# Altium PCB CamLink.PcbDoc (part 2 of 2)
Units mm, origin at the board's own origin, x right, y up, seen from the top; angles counter-clockwise.
Board outline 65 x 55 mm, 4 copper layers (TOP SIG, PWR, GND, BOT SIG), stack 1.586 mm thick; 141 components, 88 nets, 397 pads, 242 vias.
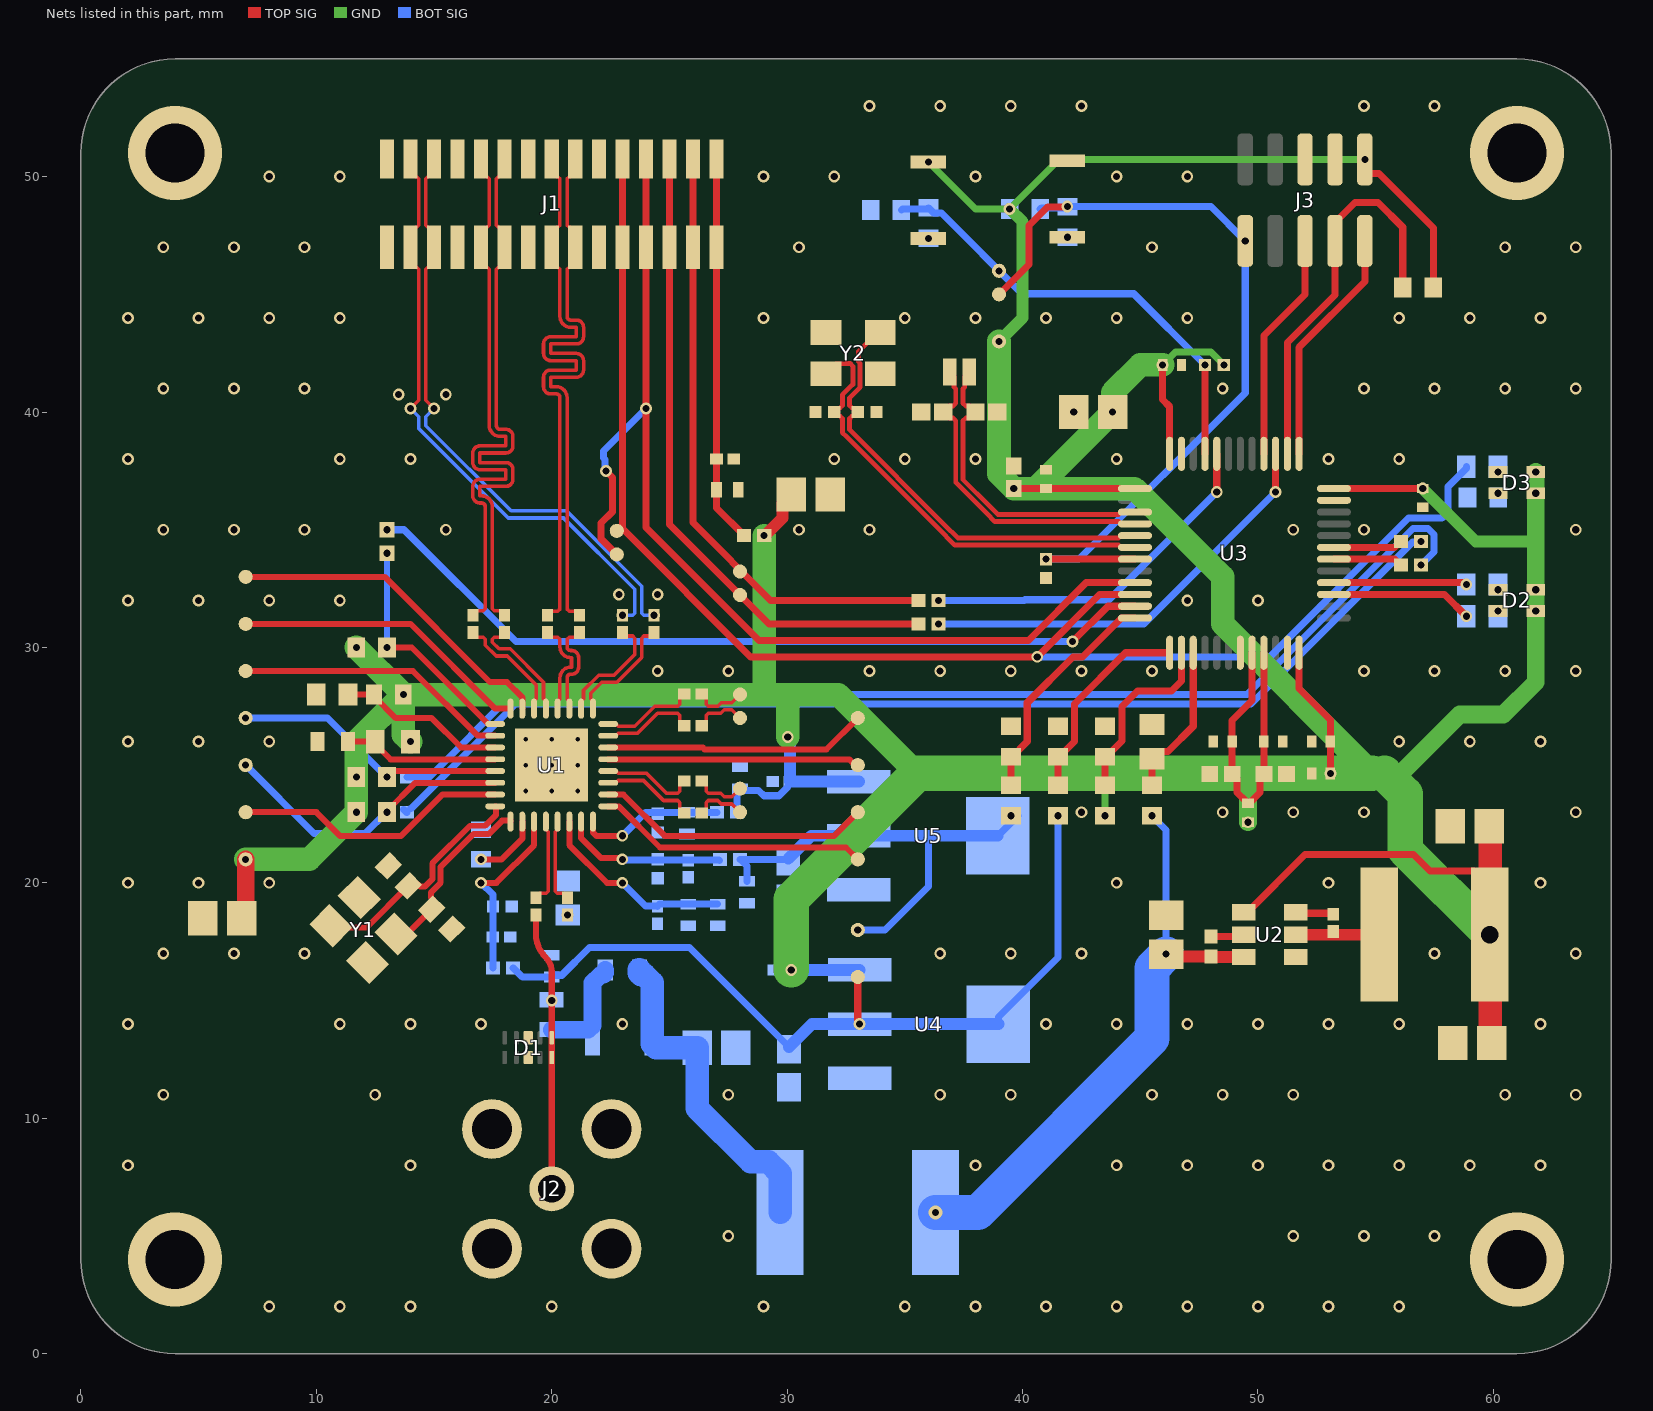
[diagram p4: the nets of this part, all layers, seen from the top]

## Part data (continued)
R19: library part CMP-2000-04011-1, Manufacturer=Yageo, Part Number=RC0603FR-0732K4L
R20: library part CMP-2000-00538-1, Manufacturer=Panasonic, Part Number=ERJ-3EKF49R9V
R21: library part CMP-2000-04112-1, Manufacturer=Yageo, Part Number=RC0603FR-0768K1L
R22: library part CMP-2000-00484-1, Manufacturer=Panasonic, Part Number=ERJ-3EKF4020V
R23 R25 R26 R32 R33 R40 R41 R42 R45 R50 R51 R52 R53: library part CMP-1012-00623-3, "Chip Resistor, 10 KOhm, +/- 1%, 0.1 W, -55 to 155 degC, 0603 (1608 Metric), RoHS, Tape and Reel", Case Code (Imperial)=0603, Case Code (Metric)=1608, Manufacturer=Panasonic, Max Operating Temperature=155degC, Max Power Dissipation=100mW, Min Operating Temperature=-55degC, Package Description="2-Pin Surface Mount Device, Body 1.6 x 0.85 mm", Package Quantity=1, Package Reference=603, Resistance=10KOhm, Temperature Coefficient=100ppm\/degreesC, Tolerance=1%, Voltage Rating=75V, Case\/Package=0603, Composition=ThickFilm, Contact Plating=Tin, Datasheet URL=https://industrial.panasonic.com/cdbs/www-data/pdf/RDA0000/AOA0000C304.pdf, Datasheet Version=02/2017, Depth=0.8mm, Height=0.45mm, Lead Free=LeadFree, Length=1.6mm, Manufacturer URL=http://www.panasonic.com/, Military Standard=Not, Mount=SurfaceMount, Mounting Technology=SurfaceMount, Number of Pins=2, Number of Terminations=2, Packaging=TapeandReel, Power Rating=100mW, Radiation Hardening=No, REACH SVHC=NoSVHC, RoHSCompliant=true, Termination=SMD/SMT, Voltage Rating (DC)=75V, Width=0.031inch
R24: library part CMP-009-00118-2, "READ THE NAME", Component Type=Standard, Design Item ID=CMP-009-00206-2, Pins=2, Source=0402jump.SchLib
R30: library part CMP-2000-00540-8, "RES SMD 5.1K OHM 1% 1/10W 0603", Case Code (Imperial)=0603, Case Code (Metric)=1608, Max Operating Temperature=155°C, Max Power Dissipation=100mW, Min Operating Temperature=-55°C, Package Quantity=1, Resistance=5.1kR, Resistance Tolerance=1%, Resistor Type="Thick Film", Temperature Coefficient=100ppm/°C, Voltage Rating=75V, Case/Package=0603, Construction=Rectangular, Contact Plating=Tin, Depth=0.8mm, Features="Automotive AEC-Q200", Height=0.022inch, Lead Free="Lead Free", Length=1.6mm, Military Standard=Not, Mount="Surface Mount", Number of Terminations=2, Packaging="Tape and Reel", Power Rating=100mW, Radiation Hardening=No, Reach SVHC Compliant=Yes, RoHS Compliant=Yes, Series=ERJ, Size Code=0603, Termination=SMD/SMT, Tolerance=1%, Voltage Rating (DC)=75V, Weight=7.1E-05oz, Width=0.8mm
R34 R36 R38: library part CMP-2000-00435-2, "Chip Resistor, 330 Ohm, +/- 1%, 0.1 W, -55 to 155 degC, 0603 (1608 Metric), RoHS, Tape and Reel", Current Rating="500 mA", Max Operating Temperature="85 degC", Min Operating Temperature="-25 degC", Package Quantity=1500, Voltage Rating="10 V", ComponentLink1Description="Manufacturer URL", ComponentLink1URL=http://www.panasonic.com/, ComponentLink2Description=Datasheet, ComponentLink2URL=http://industrial.panasonic.com/cdbs/www-data/pdf/RDA0000/AOA0000C86.pdf, Contact Finish=Gold, Contact Material=Copper, Contact Plating=Gold, DatasheetVersion=Apr-15, Gender=Male, Height="1.45 mm", Lead Pitch="1.1 mm", Length="13.7 mm", Mating Cycles=10000, Mount="Surface Mount", PackageDescription="2-Pin Surface Mount Device, Body 1.6 x 0.85 mm", PackageReference=0603, Packaging="Tape and Reel", Pins=8, REACH SVHC="No SVHC", RoHSCompliant=true, Width="1.45 mm"
R35 R37 R39: library part CMP-2000-00572-1, Manufacturer=Panasonic, Part Number=ERJ3EKF56R0V
R54: library part CMP-2000-00317-1, Manufacturer=Panasonic, Part Number=ERJ-3EKF2001V
SW1 SW2: library part CMP-10040-000029-1, "SWITCH TACTILE SPST-NO 0.02A 15V", Current Rating=5A, Flammability Rating="UL94 V-0", Insulation Color=Black, Max Operating Temperature=85°C, Min Operating Temperature=-40°C, Operating Force=240gf, Actuator Type=Standard, Connector Type=USB, Contact Plating=Gold, Gender=Receptacle, Illumination Type=Non-Illuminated, Mechanical Life=500000Cycles, Mount="Surface Mount", Number of Contacts=24, Number of Ports=1, Packaging="Tape and Reel", Switch Function=Off-Mom, Switch Travel=0.13mm, Termination=Solder, Throw Configuration=SPST
TP1 TP2 TP3 TP4 TP5 TP6 TP7 TP8 TP9 TP10 TP11 TP12 TP13 TP14 TP15 TP16 TP17 TP18 TP19 TP20 TP21 TP22 TP23 TP24 TP25: library part CMP-00025-2, "Test Point .6mm"
U1: library part CMP-015-00012-1, "3Gbps Serializer TQFN-32 Serializers / Deserializers ROHS"
U2: library part CMP-12757-000006-1, "IC REG BUCK 3.3V 2A TSOT26", Ambient Temperature Range High=+85°C, Ambient Temperature Range Low=-40°C, Manufacturer="Diodes Inc.", Max Junction Temp=+160°C, Max Supply Voltage=32V, Min Supply Voltage=3.8V, Nominal Supply Current=22uA, Output Current=2A, Output Voltage=3.3V, Package=TSOT26, Switching Frequency=1.1MHz, Temperature="to +160°C", Automotive=No, Category=IC, ComponentLink2Description=Datasheet, ComponentLink2URL=https://www.diodes.com/assets/Datasheets/AP63200-AP63201-AP63203-AP63205.pdf, Device Class L1="Integrated Circuits (ICs)", Device Class L2="Power Management ICs", Device Class L3="Voltage Regulators - Switching", Digikey Description="IC REG BUCK 3.3V 2A TSOT26", Footprint Url=https://www.diodes.com/assets/Package-Files/TSOT26.pdf, Height=1mm, Lead Free=Yes, Manufacturer Part Number=AP63203WU-7, Mouser Description="AP63203 Series 3.3 V 2 A SMT Fixed Low IQ Synchronous Buck - TSOT-26", Number Of Outputs=1, Octopart=https://octopart.com/ap63203wu-7-diodes+inc.-98099550, Output Type=Fixed, RoHS=TRUE, Standoff Height=0.01mm, Switching Topology=Buck, Temperature Range High=+160°C
U3: library part CMP-020-00017-1, "IC MCU 32BIT 32KB FLASH 48LQFP", RoHS Compliant=Yes
U4: library part CMP-0244-00308-1, "Fixed Low Drop Positive Voltage Regulator, 1.8V, 4-Pin SOT-223, Tape and Reel", ComponentLink1Description="Manufacturer URL", ComponentLink1URL=http://www.st.com, ComponentLink2Description=Datasheet, ComponentLink2URL=http://www.st.com/internet/com/TECHNICAL_RESOURCES/TECHNICAL_LITERATURE/DATASHEET/CD00000544.pdf, DatasheetVersion=1/11/2011, PackageDescription="4-Pin SOT-223 Package, 6.5 x 3.5 mm Body, 2.3 mm Pitch, 7 mm Lead Span", PackageReference=SOT-223, PackageVersion=2010
U5: library part CMP-0244-00318-1, "Fixed Low Drop Positive Voltage Regulator, 1.2V, 4-Pin SOT-223, Tape and Reel", ComponentLink1Description="Manufacturer URL", ComponentLink1URL=http://www.st.com, ComponentLink2Description=Datasheet, ComponentLink2URL=http://www.st.com/internet/com/TECHNICAL_RESOURCES/TECHNICAL_LITERATURE/DATASHEET/CD00000544.pdf, DatasheetVersion=1/11/2011, PackageDescription="4-Pin SOT-223 Package, 6.5 x 3.5 mm Body, 2.3 mm Pitch, 7 mm Lead Span", PackageReference=SOT-223, PackageVersion=2010
Y1: library part CMP-2000-05733-3, "Crystal 25MHz ±20ppm (Tol) ±30ppm (Stability) 18pF FUND 60Ω 4-Pin SMD T/R", Case/Package=CSMD, ESR (Equivalent Series Resistance)=60R, Frequency=25MHz, Frequency Stability=30ppm, Frequency Tolerance=20ppm, Load Capacitance=18pF, Max Operating Temperature=85°C, Min Operating Temperature=-40°C, Operating Frequency="25 MHz", Package Quantity=1000, Depth=2.5mm, Height=0.039inch, Lead Free="Lead Free", Length=3.2mm, Mount="Surface Mount", Number of Pins=4, Packaging="Tape and Reel", Radiation Hardening=No, Series=ABM8G, Series Resistance=60R, Termination=SMD/SMT, Tolerance=20ppm, Width=0.098inch
Y2: library part CMP-27762-011708-1, "Crystal 48MHz ±20ppm 18pF SMD-4 3.2mm x 2.5mm", Case/Package=CSMD, ESR (Equivalent Series Resistance)=35R, Frequency=48MHz, Frequency Stability=50ppm, Frequency Tolerance=20ppm, Load Capacitance=18pF, Max Operating Temperature=70°C, Min Operating Temperature=-20°C, Operating Frequency="48 MHz", Package Quantity=1000, Resistor Type=Ceramic, Depth=2.5mm, Height=0.031inch, Lead Free="Lead Free", Length=3.2mm, Mount="Surface Mount", Number of Pins=4, Packaging="Tape and Reel", Radiation Hardening=No, REACH SVHC="No SVHC", RoHS Compliant=Yes, Series=ABM8, Series Resistance=35R, Termination=SMD/SMT, Tolerance=20ppm, Width=0.098inch
Y3: library part CMP-40224-000006-1, "CRYSTAL 32.7680KHZ 12.5PF SMD", Frequency=32.768kHz, Load Capacitance=12.5pF, Manufacturer="ECS International", Package=ECX-1210, Temperature="-40°C to +85°C", Temperature Range High=+85°C, Temperature Range Low=-40°C, Tolerance=20ppm, Automotive=No, Category=Crys, ComponentLink2Description=Datasheet, ComponentLink2URL=https://ecsxtal.com/store/pdf/ECX-1210.pdf, Device Class L1="Passive Components", Device Class L2="Crystals / Oscillators", Device Class L3=Crystals, Digikey Description="CRYSTAL 32.7680KHZ 12.5PF SMD", ESR=90kΩ, Height=0.5mm, Lead Free=Yes, Manufacturer Part Number=ECS-.327-12.5-1210-TR, Octopart=https://octopart.com/ecs-.327-12.5-1210-tr-ecs+international-81221340, RoHS=TRUE, Series=ECX-1210

## Via types
v1: diameter 0.5, hole 0.3, TOP SIG to BOT SIG, tented both sides, 151 vias
v2: diameter 0.5, hole 0.3, TOP SIG to BOT SIG, tented top, 69 vias
v3: diameter 0.5, hole 0.2, TOP SIG to BOT SIG, 9 vias
v4: diameter 0.5, hole 0.3, TOP SIG to BOT SIG, 8 vias
v5: diameter 4, hole 2.5, TOP SIG to BOT SIG, 4 vias
v6: diameter 1, hole 0.75, TOP SIG to BOT SIG, tented top, 1 vias

## Nets (pads, with @x,y where several pads share a name; then routed paths per layer and width w, separated by ;. In a path a pad name is that pad's centre, name@x,y a point inside that pad or via, vN(x,y) a via of type N, cw(c..) or ccw(c..) an arc to the next point about the centre after c; other vN are vias at no path point)
1V2: C28.1 C54.1 R29.1 R50.2 TP18.1 U5.2 U5.4 | length 19.8
  BOT SIG w0.3: R29.1@28,21 R29.1@28.025,21 ; C28.1@28.3,20.062 28.3,20.725 R29.1@28.025,21 ; C54.1@29.977,21 R29.1@28.025,21 ; v2(33,18) 34.15,18 36,19.85 36,22 ; U5.4@38.95,22 39.8,22.85 v2(39.5,22.85)
  BOT SIG w0.5: C54.1@30.05,21.025 31.025,22 U5.2@33.05,22 36,22 U5.4@38.95,22
1V2_SENSE: R50.1 R52.2 U3.12 | length 9.9
  TOP SIG w0.3: R50.1@39.5,24.15 R52.2@39.5,25.35 39.55,25.35 40.2,26 40.2,27.65 42.15,29.6 42.55,29.6 44.2,31.25 U3.12@44.775,31.25
1V8: C27.1 C53.1 R28.1 R45.2 TP17.1 U4.2 U4.4 | length 35.7
  TOP SIG w0.3: TP17.1@33,16 33,14.129 33.075,14.054 v2(33.075,14)
  BOT SIG w0.3: R28.1@18.35,16.375 18.375,16.375 18.75,16 C27.1@20,16 20.075,16.075 20.425,16.075 21.6,17.25 25.85,17.25 30.075,13.025 C53.1@30.075,12.927 ; U4.4@38.975,14 38.975,14.3 41.5,16.825 v2@41.5,23.042
  BOT SIG w0.5: C53.1@30.075,13.025 31.05,14 v2(33.075,14) U4.4@38.975,14
  other v2: 41.5,22.85
1V8_SENSE: R45.1 R51.2 U3.13 | length 8.7
  TOP SIG w0.3: R45.1@41.5,24.15 R51.2@41.5,25.35 41.55,25.35 42.2,26 42.2,27.6 44.375,29.775 U3.13@46.25,29.775
3V3: C26.1 C32.2 C33.2 C34.2 C35.2 C36.2 C37.2 C39.1 C40.2 C41.2 C42.2 C45.1 C46.2 C55.2 C56.2 D2.2 D2.3 D3.2 D3.3 FB1.1 J3.1 L3.2 R16.2 R17.2 R19.2 R23.2 R25.2 R26.2 R27.1 R32.2 R40.1 R42.1 SW1.2 TP15.1 TP19.1 U2.1 U3.1 U3.24 U3.36 U3.48 U4.3 U5.3 | length 244.2
  TOP SIG w0.3: v2(39.625,36.75) C46.2@41,36.75 U3.1@44.775,36.75 ; v2(45.95,42) 45.95,40.525 46.25,40.225 U3.48@46.25,38.225 ; U2.1@49.401,18.75 49.551,18.75 52.001,21.2 56.6,21.2 57.3,20.5 59.2,20.5 59.85,19.85 v6(59.85,17.8) ; U3.24@51.75,29.775 51.75,28.25 53.079,26.921 C40.2@53.079,26 v2(53.079,24.65) ; U3.36@53.225,36.75 v2(57,36.75) ; v2(54.54,50.73) 54.54,50.305 54.714,50.131 55.139,50.131 57.45,47.82 R40.1@57.45,45.3 ; C32.2@59.926,13.2 C32.2@60.126,13
  TOP SIG w0.5: v2(29.025,34.75) 29.05,34.75 29.797,35.497 29.797,36.123 C34.2@30.174,36.5
  TOP SIG w0.75: C36.2@6.826,18.5 7,18.674 v2(7,21)
  TOP SIG w1: C33.2@59.826,22.4 59.876,22.35 59.876,13.25 C32.2@59.926,13.2
  GND w0.3: v2(36,50.625) 38,48.625 v2(39.45,48.625) 41.555,50.73 v2(54.54,50.73) ; v2(43.5,22.85) 43.5,24.65 ; v2(45.95,42) 46.5,42.55 48,42.55 v2(48.55,42)
  GND w0.5: v4(39,43) 40,44 40,48.075 v2(39.45,48.625) ; v2(57,36.75) 59.25,34.5 61.8,34.5
  GND w0.75: 49.465,24.65 49.579,24.536 v2(49.579,22.575) ; 55.371,24.65 56.075,24.65 58.575,27.15 60.425,27.15 61.8,28.525 v2(61.8,31.55) v2(61.8,32.45) 61.8,34.5 v2(61.8,36.55) v2(61.8,37.45)
  GND w1: v2(7,21) 9.7,21 v2(11.7,23) v2(11.7,24.5) 11.7,26 v2(13.7,28) ; v2(11.7,30) v2(13.7,28) ; v2(14,26) 13.7,26.3 v2(13.7,28) ; v2(29.025,34.75) 29.025,28 ; v2(30.025,26.2) 30.025,28 ; 35.525,24.65 32.175,28 30.025,28 ; v4(39,43) 39,37.375 v2(39.625,36.75) 40.576,36.75 ; v2(45.95,42) 45,42 43.826,40.826 v2(43.826,40) 40.576,36.75 ; 55.371,24.65 54.85,24.65 48.5,31 48.5,33 44.75,36.75 40.576,36.75 ; v2(13.7,28) 29.025,28 ; 29.025,28 30.025,28
  GND w1.5: v2(30.175,16.3) 30.175,19.3 35.525,24.65 43.5,24.65 49.465,24.65 v2(53.079,24.65) 54.85,24.65 ; 55.371,24.65 56.25,23.771 56.25,21.4 v6(59.85,17.8)
  BOT SIG w0.3: R27.1@27.875,23 27.875,23.925 27.95,24 C26.1@28,24 28.075,23.925 28.788,23.925 29.012,23.7 29.654,23.7 30.005,24.052
  BOT SIG w0.5: v2(30.025,26.2) 30.125,26.1 C56.2@30.125,24.3 U5.3@33.05,24.3 ; v2(30.175,16.3) U4.3@33.075,16.3
3V3_SENSE: R32.1 R33.2 U3.14 | length 7.8
  TOP SIG w0.3: R32.1@43.5,24.15 R33.2@43.5,25.35 43.55,25.35 44.225,26.025 44.225,27.488 44.887,28.15 46.325,28.15 46.75,28.575 U3.14@46.75,29.775
BOOT: C37.1 R34.1 R41.2 TP13.1 U3.45 | length 19.5
  TOP SIG w0.3: U3.45@47.75,38.225 v2(47.75,42)
  BOT SIG w0.3: R41.2@34.85,48.575 34.9,48.625 35.95,48.625 R34.1@36,48.675 36.225,48.45 36.55,48.45 39.975,45.025 44.725,45.025 v2(47.75,42)
  other v4: 39,46
CAM_IO0: J1.11 R39.1 TP24.1 U3.10 | length 63
  TOP SIG w0.3: 23,40.125 23,35.05 28.45,29.6 v4(40.625,29.6) 43.275,32.25 U3.10@44.775,32.25 ; 23,40.15 J1.11@23,47 J1.11@23,50.75
  BOT SIG w0.3: v4(40.625,29.6) 50.5,29.6 56.4,35.5 57.825,35.5 58.075,35.75 58.075,36.825 58.85,37.6 R39.1@58.85,37.675
CAM_IO1: J1.12 TP25.1 U3.9 | length 47
  TOP SIG w0.3: v4@22.3,37.499 22.575,37.224 22.575,35.764 22.1,35.289 22.1,34.615 TP25.1@22.763,33.952 ; J1.12@24,50.75 J1.12@24,47 v4(24,40.15) 24,35.1 28.8,30.3 40.25,30.3 42.7,32.75 U3.9@44.775,32.75
  BOT SIG w0.3: v4(22.3,37.5) 22.262,37.538 22.262,37.988 22.2,38.05 22.2,38.35 v4(24,40.15)
CAM_SCL: J1.13 R49.1 TP16.1 | length 27.8
  TOP SIG w0.3: J1.13@25,50.75 J1.13@25,47 25,35.225 TP16.1@28,32.225 29.225,31 R49.1@35.55,31
CAM_SDA: J1.14 R46.2 TP22.1 | length 26.4
  TOP SIG w0.3: 26,40.125 26,35.3 29.3,32 R46.2@35.575,32 ; 26,40.15 J1.14@26,47 J1.14@26,50.75
CFG0: R17.1 R18.2 U1.3 | length 7.2
  TOP SIG w0.254: R18.2@11.35,28 R17.1@12.45,28 12.45,27.925 13.375,27 14.9,27 16.15,25.75 U1.3@17.6,25.75
CFG1: R19.1 R21.2 U1.4 | length 6.6
  TOP SIG w0.254: R21.2@11.35,26 R19.1@12.5,26 12.5,25.9 13.15,25.25 U1.4@17.6,25.25
CLK_N: C14.2 U1.28 | length 4.2
  TOP SIG w0.152: C14.2@19.825,30.633 19.825,30.6 19.985,30.44 20.26,30.44 20.349,30.351 20.349,30.25 20.349,30.023 ccw(c20.803,30.023) 20.803,29.569 20.84,29.569 20.84,29.163 20.803,29.163 ccw(c20.803,28.71) 20.349,28.71 20.349,28.004 20.349,27.826 20.25,27.727 U1.28@20.25,27.4
CLK_P: C12.2 U1.27 | length 4.2
  TOP SIG w0.152: U1.27@20.75,27.4 20.75,27.727 20.651,27.826 20.651,28.004 20.651,28.71 cw(c20.803,28.71) 20.803,28.861 20.84,28.861 ccw(c20.84,29.163) 21.142,29.163 21.142,29.569 ccw(c20.84,29.569) 20.84,29.871 20.803,29.871 cw(c20.803,30.023) 20.651,30.023 20.651,30.25 20.651,30.351 20.74,30.44 21.015,30.44 21.175,30.6 C12.2@21.175,30.633
CONF_SCL: R26.1 R44.2 TP23.1 U1.6 | length 12.7
  TOP SIG w0.254: v2(13,23) 13,23.05 14.2,24.25 U1.6@17.6,24.25
  BOT SIG w0.3: v4(7,25) 9.9,22.1 12.075,22.1 12.975,23 v2(13,23)
CONF_SDA: R25.1 R43.2 TP21.1 U1.5 | length 11.7
  TOP SIG w0.254: v2(13,24.5) v2(13,24.5) 13.248,24.75 U1.5@17.6,24.75
  BOT SIG w0.3: v4(7,27) 10.475,27 12.975,24.5 v2(13,24.5)
CSI_CLK_N: C14.1 J1.8 | length 25.1
  TOP SIG w0.152: C14.1@19.825,31.367 19.825,31.381 19.985,31.542 20.26,31.542 20.349,31.631 20.349,39.35 20.349,40.619 ccw(c20.197,40.619) 20.197,40.771 19.951,40.771 cw(c19.951,41.073) 19.649,41.073 19.649,41.479 cw(c19.951,41.479) 19.951,41.781 21.049,41.781 21.049,42.186 19.951,42.186 cw(c19.951,42.488) 19.649,42.488 19.649,42.894 cw(c19.951,42.894) 19.951,43.196 21.049,43.196 21.049,43.602 20.803,43.602 cw(c20.803,44.056) 20.349,44.056 20.349,44.283 20.349,46.062 20.26,46.151 20.224,46.151 20,46.375 J1.8@20,47 20,47.625 20.224,47.849 20.26,47.849 20.349,47.938 20.349,49.912 20.26,50.001 20.224,50.001 20,50.225 J1.8@20,50.75
CSI_CLK_P: C12.1 J1.9 | length 25.1
  TOP SIG w0.152: J1.9@21,50.75 21,50.225 20.776,50.001 20.74,50.001 20.651,49.912 20.651,47.938 20.74,47.849 20.776,47.849 21,47.625 J1.9@21,47 21,46.375 20.776,46.151 20.74,46.151 20.651,46.062 20.651,44.283 20.651,44.056 ccw(c20.803,44.056) 20.803,43.904 21.049,43.904 cw(c21.049,43.602) 21.351,43.602 21.351,43.196 cw(c21.049,43.196) 21.049,42.894 19.951,42.894 19.951,42.488 21.049,42.488 cw(c21.049,42.186) 21.351,42.186 21.351,41.781 cw(c21.049,41.781) 21.049,41.479 19.951,41.479 19.951,41.073 20.197,41.073 cw(c20.197,40.619) 20.651,40.619 20.651,39.35 20.651,31.631 20.74,31.542 21.015,31.542 21.175,31.381 C12.1@21.175,31.367
CSI_D0_N: C4.1 J1.2 | length 25.8
  TOP SIG w0.152: v2(14,40.15) 14.349,40.499 14.349,46.062 14.26,46.151 14.224,46.151 14,46.375 J1.2@14,47 14,47.625 14.224,47.849 14.26,47.849 14.349,47.938 14.349,49.912 14.26,50.001 14.224,50.001 14,50.225 J1.2@14,50.75
  BOT SIG w0.152: v2(14,40.15) 14.349,39.801 14.349,39.299 18.148,35.5 20.5,35.5 23.522,32.478 23.522,31.874 23.524,31.872 23.524,31.456 23.435,31.367 v2(23,31.367)
CSI_D0_P: C3.1 J1.3 | length 25.8
  TOP SIG w0.152: v2(15,40.15) 14.651,40.499 14.651,46.062 14.74,46.151 14.776,46.151 15,46.375 J1.3@15,47 15,47.625 14.776,47.849 14.74,47.849 14.651,47.938 14.651,49.912 14.74,50.001 14.776,50.001 15,50.225 J1.3@15,50.75
  BOT SIG w0.152: v2(15,40.15) 14.651,39.801 14.651,39.424 18.273,35.802 20.625,35.802 23.824,32.603 23.824,31.999 23.826,31.997 23.826,31.456 23.915,31.367 v2(24.35,31.367)
CSI_D1_N: C6.1 J1.5 | length 24.9
  TOP SIG w0.152: C6.1@16.65,31.367 16.65,31.4 16.81,31.56 17.085,31.56 17.174,31.649 17.174,34.532 17.174,35.983 ccw(c17.022,35.983) 17.022,36.135 16.951,36.135 cw(c16.951,36.437) 16.649,36.437 16.649,36.843 cw(c16.951,36.843) 16.951,37.145 18.049,37.145 18.049,37.551 16.951,37.551 cw(c16.951,37.853) 16.649,37.853 16.649,38.259 cw(c16.951,38.259) 16.951,38.561 18.049,38.561 18.049,38.967 17.803,38.967 cw(c17.803,39.42) 17.349,39.42 17.349,39.647 17.349,46.062 17.26,46.151 17.224,46.151 17,46.375 J1.5@17,47 17,47.625 17.224,47.849 17.26,47.849 17.349,47.938 17.349,49.912 17.26,50.001 17.224,50.001 17,50.225 J1.5@17,50.75
CSI_D1_P: C5.1 J1.6 | length 24.9
  TOP SIG w0.152: C5.1@18,31.367 18,31.4 17.84,31.56 17.565,31.56 17.476,31.649 17.476,34.532 17.476,35.983 ccw(c17.022,35.983) 17.022,36.437 16.951,36.437 16.951,36.843 18.049,36.843 ccw(c18.049,37.145) 18.351,37.145 18.351,37.551 ccw(c18.049,37.551) 18.049,37.853 16.951,37.853 16.951,38.259 18.049,38.259 ccw(c18.049,38.561) 18.351,38.561 18.351,38.967 ccw(c18.049,38.967) 18.049,39.268 17.803,39.268 cw(c17.803,39.42) 17.651,39.42 17.651,39.647 17.651,46.062 17.74,46.151 17.776,46.151 18,46.375 J1.6@18,47 18,47.625 17.776,47.849 17.74,47.849 17.651,47.938 17.651,49.912 17.74,50.001 17.776,50.001 18,50.225 J1.6@18,50.75
CSI_D2_N: C8.1 TP2.1 | length 2.2
  TOP SIG w0.152: C8.1@26.367,24.325 26.4,24.325 26.56,24.165 26.56,23.89 26.649,23.801 27.179,23.801 27.329,23.651 27.651,23.651 TP2.1@28,24
CSI_D2_P: C7.1 TP1.1 | length 2.2
  TOP SIG w0.152: C7.1@26.367,22.975 26.4,22.975 26.56,23.135 26.56,23.41 26.649,23.499 27.054,23.499 27.204,23.349 27.651,23.349 TP1.1@28,23
CSI_D3_N: C11.1 TP4.1 | length 2.2
  TOP SIG w0.152: C11.1@26.367,28.025 26.4,28.025 26.56,27.865 26.56,27.59 26.649,27.501 27.054,27.501 27.204,27.651 27.651,27.651 TP4.1@28,28
CSI_D3_P: C10.1 TP3.1 | length 2.2
  TOP SIG w0.152: C10.1@26.367,26.675 26.4,26.675 26.56,26.835 26.56,27.11 26.649,27.199 27.179,27.199 27.329,27.349 27.651,27.349 TP3.1@28,27
DA0_N: C4.2 U1.26 | length 4.9
  TOP SIG w0.152: U1.26@21.25,27.4 21.25,27.727 21.349,27.826 21.349,28.178 21.993,28.822 22.645,28.822 23.524,29.701 23.524,30.396 23.435,30.485 23.148,30.485 C4.2@23,30.633
DA0_P: C3.2 U1.25 | length 4.9
  TOP SIG w0.152: U1.25@21.75,27.4 21.75,27.727 21.651,27.826 21.651,28.053 22.118,28.52 22.77,28.52 23.826,29.576 23.826,30.396 23.915,30.485 24.202,30.485 C3.2@24.35,30.633
DA1_N: C6.2 U1.30 | length 4.8
  TOP SIG w0.152: C6.2@16.65,30.633 16.65,30.6 16.81,30.44 17.085,30.44 17.174,30.351 17.174,30.1 17.637,29.637 18.113,29.637 19.349,28.401 19.349,27.826 19.25,27.727 U1.30@19.25,27.4
DA1_P: C5.2 U1.29 | length 4.8
  TOP SIG w0.152: C5.2@18,30.633 18,30.6 17.84,30.44 17.565,30.44 17.476,30.351 17.476,30.225 17.762,29.938 18.239,29.938 19.651,28.526 19.651,27.826 19.75,27.727 U1.29@19.75,27.4
DA2_N: C8.2 U1.20 | length 4
  TOP SIG w0.152: U1.20@22.4,24.75 22.727,24.75 22.826,24.651 24.026,24.651 24.876,23.801 25.351,23.801 25.44,23.89 25.44,24.165 25.6,24.325 C8.2@25.633,24.325
DA2_P: C7.2 U1.19 | length 4
  TOP SIG w0.152: U1.19@22.4,24.25 22.727,24.25 22.826,24.349 23.901,24.349 24.751,23.499 25.351,23.499 25.44,23.41 25.44,23.135 25.6,22.975 C7.2@25.633,22.975
DA3_N: C11.2 U1.24 | length 4
  TOP SIG w0.152: U1.24@22.4,26.75 22.727,26.75 22.826,26.651 23.521,26.651 24.371,27.501 25.351,27.501 25.44,27.59 25.44,27.865 25.6,28.025 C11.2@25.633,28.025
DA3_P: C10.2 U1.23 | length 4
  TOP SIG w0.152: U1.23@22.4,26.25 22.727,26.25 22.826,26.349 23.646,26.349 24.496,27.199 25.351,27.199 25.44,27.11 25.44,26.835 25.6,26.675 C10.2@25.633,26.675
G_LED: R35.1 U3.27 | length 6
  TOP SIG w0.3: U3.27@53.225,32.25 57.925,32.25 v2(58.85,31.325)
GND: C1.2 C2.1 C15.2 C16.2 C17.2 C18.1 C19.1 C20.1 C21.1 C22.1 C23.2 C24.2 C25.1 C26.2 C27.2 C28.2 C29.2 C31.1 C32.1 C33.1 C34.1 C35.1 C36.1 C38.2 C39.2 C40.1 C41.1 C42.1 C43.2 C44.1 C45.2 C46.1 C47.2 C48.1 C49.2 C50.2 C51.2 C52.2 C53.2 C54.2 C55.1 C56.1 D1.3 D1.8 J1.1 J1.4 J1.7 J1.10 J2.2 J3.3 J3.5 R18.1 R20.1 R21.1 R22.1 R33.1 R38.2 R41.1 R51.1 R52.1 R54.1 SW2.2 U1.33 U2.4 U3.19 U3.23 U3.35 U3.47 U4.1 U5.1 Y1.2 Y1.4 Y2.2 Y2.4
  other v1: 8,2 11,2 14,2 20,2 29,2 35,2 38,2 41,2 44,2 47,2 50,2 53,2 56,2 27.5,5 51.5,5 54.5,5 57.5,5 2,8 14,8 38,8 44,8 47,8 50,8 53,8 56,8 59,8 62,8 3.5,11 12.5,11 27.5,11 36.5,11 39.5,11 45.5,11 48.5,11 51.5,11 60.5,11 63.5,11 2,14 11,14 14,14 17,14 23,14 41,14 44,14 47,14 50,14 53,14 56,14 62,14 3.5,17 6.5,17 9.5,17 36.5,17 39.5,17 42.5,17 57.5,17 63.5,17 2,20 5,20 8,20 44,20 53,20 62,20 42.5,23 48.5,23 51.5,23 54.5,23 63.5,23 2,26 5,26 8,26 56,26 59,26 62,26 24.5,29 27.5,29 33.5,29 36.5,29 39.5,29 42.5,29 45.5,29 54.5,29 57.5,29 60.5,29 63.5,29 2,32 5,32 8,32 11,32 47,32 50,32 3.5,35 6.5,35 9.5,35 15.5,35 30.5,35 33.5,35 51.5,35 54.5,35 63.5,35 2,38 11,38 14,38 32,38 35,38 38,38 44,38 53,38 56,38 42.174,40 3.5,41 6.5,41 9.5,41 48.5,41 54.5,41 57.5,41 60.5,41 63.5,41 2,44 5,44 8,44 11,44 29,44 35,44 38,44 41,44 44,44 47,44 56,44 59,44 62,44 3.5,47 6.5,47 9.5,47 30.5,47 45.5,47 60.5,47 63.5,47 8,50 11,50 29,50 32,50 38,50 44,50 47,50 33.5,53 36.5,53 39.5,53 42.5,53 54.5,53 57.5,53
  other v2: 22.85,32.25 24.5,32.25 13.5,40.75 15.5,40.75
  other v3: 18.9,23.9 20,23.9 21.1,23.9 18.9,25 20,25 21.1,25 18.9,26.1 20,26.1 21.1,26.1
  other v5: 4,4 61,4 4,51 61,51
I2C2_SCL: R44.1 R48.1 | length 47.8
  BOT SIG w0.3: R44.1@13.7,23.125 13.825,23 R44.1@13.85,23 ; R44.1@14,23.15 14.018,23.15 18.466,27.598 49.698,27.598 56.568,34.468 56.893,34.468 v2(56.925,34.5)
I2C2_SDA: R43.1 R47.1 | length 49.6
  BOT SIG w0.3: R43.1@13.85,24.5 14.8,24.5 18.3,28 49.532,28 56.582,35.05 57.224,35.05 57.475,34.799 57.475,34.05 v2(56.925,33.5)
NetC1_1: C1.1 C2.2 J1.15 R16.1 | length 16.5
  TOP SIG w0.3: J1.15@27,50.75 J1.15@27,47 C2.2@27,38 C1.1@27,36.7 27,35.925 R16.1@28.175,34.75
NetC13_2: C13.2 R20.2
  other v2: 20.675,18.633
NetC17_1: C17.1 C18.2 R27.2 U1.16 | length 6.2
  TOP SIG w0.254: U1.16@21.75,22.6 21.75,22.149 21.899,22 v2(23,22)
  BOT SIG w0.3: v2(23,22) 23.988,22.987 R27.2@27.025,22.987
NetC19_2: C19.2 C20.2 R28.2 U1.11 | length 7.7
  TOP SIG w0.254: v2(17,20) 17.65,20 19.25,21.6 U1.11@19.25,22.6
  BOT SIG w0.3: v2(17,20) 17.5,19.5 C19.2@17.5,19 C20.2@17.5,17.7 R28.2@17.5,16.375
NetC21_2: C21.2 C22.2 R29.2 U1.15 | length 7
  TOP SIG w0.254: U1.15@21.25,22.6 21.25,21.9 22.103,21.047 22.953,21.047 v2(23,21)
  BOT SIG w0.3: v2(23,21) 23.025,20.975 27.1,20.975 R29.2@27.125,20.95
NetC23_1: C23.1 C24.1 C25.2 U1.14 | length 8.4
  TOP SIG w0.254: U1.14@20.75,22.6 20.75,21.6 22.35,20 v2(23,20)
  BOT SIG w0.3: v2(23,20) 23.99,19.01 24.49,19.01 C25.2@24.5,19 ; C25.2@24.5,19.01 24.586,19.096 C23.1@25.8,19.096 C24.1@27.05,19.096
NetC29_1: C29.1 F1.2 L1.1 R30.1 | length 14.3
  BOT SIG w1: R30.1@23.725,16.3 23.725,16.175 23.8,16.1 23.925,16.1 24.27,15.755 24.27,13.175 24.445,13 C29.1@26.174,13 26.174,10.426 28.45,8.15 29.2,8.15 29.7,7.65 F1.2@29.7,6
NetC30_1: C30.1 U2.6 | length 1.6
  TOP SIG w0.3: U2.6@51.6,18.75 51.641,18.708 53.158,18.708 C30.1@53.2,18.667
NetC30_2: C30.2 L3.1 U2.5 | length 3.6
  TOP SIG w0.5: U2.5@51.6,17.8 L3.1@55.15,17.8
NetD2_1: D2.1 R35.2
  other v2: 60.2,31.55
NetD2_4: D2.4 R37.2
  other v2: 60.2,32.45
NetD3_1: D3.1 R38.1
  other v2: 60.2,36.55
NetD3_4: D3.4 R39.2
  other v2: 60.2,37.45
NetL1_2: L1.2 L2.1 R30.2 | length 4.5
  BOT SIG w0.75: L2.1@20,13.765 21.555,13.765 21.73,13.94 21.73,15.755 22.075,16.1 22.2,16.1 22.275,16.175 R30.2@22.275,16.3
NetR22_2: R22.2 U1.10 | length 2.8
  TOP SIG w0.254: v2(17,21) 17.875,21 18.75,21.875 U1.10@18.75,22.6
NetR23_1: R23.1 R24.1 U1.1 | length 9.9
  TOP SIG w0.254: v2(13,30) 14.054,30 17.304,26.75 U1.1@17.6,26.75
  BOT SIG w0.254: v2(13,30) v2(13,34)
NetR31_1: R31.1 U2.2 | length 1.4
  TOP SIG w0.3: R31.1@48,17.725 49.219,17.725 ccw(c49.219,17.981) U2.2@49.401,17.8
NetR34_2: R34.2 SW1.1
  other v2: 36,47.375
NetR36_2: R36.2 SW2.1
  other v2: 41.9,47.425
NetR46_1: R46.1 U3.44 | length 15.4
  TOP SIG w0.3: v2(48.25,36.6) U3.44@48.25,38.225
  BOT SIG w0.3: v2(36.425,32) 40.084,32 40.109,32.025 43.675,32.025 v2(48.25,36.6)
NetR47_2: R47.2 U3.30 | length 3
  TOP SIG w0.3: U3.30@53.225,33.75 55.8,33.75 56.05,33.5 R47.2@56.075,33.5
NetR48_2: R48.2 U3.31 | length 3
  TOP SIG w0.3: U3.31@53.225,34.25 55.8,34.25 56.05,34.5 R48.2@56.075,34.5
NetR49_2: R49.2 U3.39 | length 18.3
  TOP SIG w0.3: v2(50.75,36.6) U3.39@50.75,38.225
  BOT SIG w0.3: v2(36.425,31) 45.15,31 v2(50.75,36.6)
NetTP5_1: TP5.1 U1.2 | length 11.7
  TOP SIG w0.254: TP5.1@7,29 14.1,29 16.85,26.25 U1.2@17.6,26.25
NetTP6_1: TP6.1 U1.17 | length 11.5
  TOP SIG w0.254: U1.17@22.4,23.25 22.85,23.25 24.6,21.5 32.5,21.5 TP6.1@33,21
NetTP7_1: TP7.1 U1.18 | length 11.7
  TOP SIG w0.254: U1.18@22.4,23.75 23.05,23.75 24.8,22 32,22 TP7.1@33,23
NetTP8_1: TP8.1 U1.21 | length 10.7
  TOP SIG w0.254: U1.21@22.4,25.25 32.642,25.25 32.892,25 TP8.1@33,25
NetTP9_1: TP9.1 U1.22 | length 11.2
  TOP SIG w0.254: U1.22@22.4,25.75 26.42,25.75 26.497,25.673 31.673,25.673 TP9.1@33,27
NetTP10_1: TP10.1 U1.31 | length 14.3
  TOP SIG w0.254: TP10.1@7,33 12.9,33 17.375,28.525 18.1,28.525 18.748,27.877 18.748,27.402 U1.31@18.75,27.4
NetTP11_1: TP11.1 U1.32 | length 12.7
  TOP SIG w0.254: TP11.1@7,31 14,31 17.6,27.4 U1.32@18.25,27.4
NetTP12_1: TP12.1 U1.7 | length 11.7
  TOP SIG w0.254: TP12.1@7,23 10,23 11,22 13.6,22 15.35,23.75 U1.7@17.6,23.75
nPWDN: R24.2 U3.11 | length 34.4
  TOP SIG w0.3: v2(42.125,30.25) 43.625,31.75 U3.11@44.775,31.75
  BOT SIG w0.3: v2(13,35) 13.725,35 18.475,30.25 v2(42.125,30.25)
PoC_PWR: C31.2 F1.1 R31.2 R53.2 TP20.1 U2.3 | length 25.5
  TOP SIG w0.5: v2(46.1,16.974) ccw(c46.34,17.214) 46.34,16.875 R31.2@48,16.875 ccw(c48.06,16.935) 48.06,16.85 U2.3@49.401,16.85
  BOT SIG w0.3: v2(45.5,22.85) 46.1,22.25 v2(46.1,16.974)
  BOT SIG w1.5: v2(36.3,6) 38.1,6 45.5,13.4 45.5,16.374 v2(46.1,16.974)
PoC_TAP: C9.2 D1.1 D1.10 J2.1 L2.2 | length 11.8
  TOP SIG w0.261: C9.2@19.325,18.633 19.325,17.851 ccw(c20.776,17.851) 19.75,16.825 cw(c19.146,16.221) 20,16.221 v2(20,15) D1.1@20,13.417 D1.10@20,12.582 J2.1@20,7
R_LED: R37.1 U3.28 | length 5.7
  TOP SIG w0.3: U3.28@53.225,32.75 58.721,32.75 58.796,32.675 v2(58.85,32.675)
RESETN: C38.1 J3.10 R36.1 R42.2 TP14.1 U3.7 | length 36.4
  TOP SIG w0.3: TP14.1@39,45 40.273,46.273 40.273,47.923 41.055,48.705 41.88,48.705 v4(41.9,48.725) ; v2(41,33.75) U3.7@44.775,33.75
  BOT SIG w0.3: R42.2@40.75,48.625 40.8,48.675 41.85,48.675 v4(41.9,48.725) 48.005,48.725 v2(49.46,47.27) 49.46,40.81 42.4,33.75 v2(41,33.75)
SIO_N: C13.1 U1.13 | length 3.7
  TOP SIG w0.152: U1.13@20.25,22.6 20.25,22.273 20.151,22.174 20.151,19.649 20.24,19.56 20.515,19.56 20.675,19.4 C13.1@20.675,19.367
SIO_P: C9.1 U1.12 | length 3.7
  TOP SIG w0.152: C9.1@19.325,19.367 19.325,19.4 19.485,19.56 19.76,19.56 19.849,19.649 19.849,22.174 19.75,22.273 U1.12@19.75,22.6
SWCLK: J3.4 R40.2 U3.38 | length 16.9
  TOP SIG w0.3: U3.38@51.25,38.225 51.25,42.95 53.27,44.97 J3.4@53.27,47.27 53.27,48.045 54.125,48.9 55.1,48.9 56.15,47.85 R40.2@56.15,45.3
SWDIO: J3.2 U3.37 | length 10.2
  TOP SIG w0.3: U3.37@51.75,38.225 51.75,42.75 54.54,45.54 J3.2@54.54,47.27
SWO: J3.6 U3.40 | length 10.5
  TOP SIG w0.3: U3.40@50.25,38.225 50.25,43.25 52,45 J3.6@52,48
VCC_SENSE: R53.1 R54.2 U3.15 | length 6.6
  TOP SIG w0.3: R53.1@45.5,24.15 R54.2@45.5,25.275 45.8,25.575 46.175,25.575 47.25,26.65 U3.15@47.25,29.775
VDDA: C43.1 C44.2 C47.1 C48.2 FB1.2 U3.20 U3.21 | length 13.8
  TOP SIG w0.3: U3.20@49.75,29.775 49.75,27.75 48.904,26.904 C48.2@48.904,26 48.905,25.998 48.905,24.627 C47.1@48.907,24.625 48.929,24.625 49.115,24.439 49.115,23.839 49.479,23.475 49.479,23.425 49.529,23.375 FB1.2@49.579,23.375 49.629,23.375 50.092,23.839 50.092,24.467 C43.1@50.25,24.625 C44.2@50.25,26 U3.21@50.25,29.775
X25_N: C16.1 U1.9 Y1.3 | length 7.8
  TOP SIG w0.254: Y1.3@13.379,17.823 13.838,17.823 C16.1@14.899,18.884 14.952,18.937 14.952,19.288 14.863,19.376 14.863,19.587 15.283,20.007 15.283,20.68 16.673,22.07 17.321,22.07 17.891,22.639 18.248,22.639 18.25,22.637 U1.9@18.25,22.6
X25_P: C15.1 U1.8 Y1.1 | length 9.9
  TOP SIG w0.254: Y1.1@10.621,18.177 10.692,18.106 12.141,18.106 C15.1@13.909,19.874 13.962,19.927 14.313,19.927 14.402,19.838 14.612,19.838 14.928,20.154 14.928,20.828 16.525,22.425 17.174,22.425 17.639,22.891 17.639,23.248 17.637,23.25 U1.8@17.6,23.25
X32_N: C52.1 U3.4 Y3.2 | length 13.8
  TOP SIG w0.2: Y3.2@36.903,41.7 37.091,41.512 37.091,41.056 37.165,40.982 37.165,40.373 37.048,40.256 36.887,40.256 C52.1@36.631,40 36.887,39.744 37.048,39.744 37.165,39.627 37.165,37.009 38.479,35.695 38.824,35.349 44.074,35.349 44.173,35.25 U3.4@44.775,35.25
X32_P: C51.1 U3.3 Y3.1 | length 13.3
  TOP SIG w0.2: Y3.1@37.728,41.7 37.541,41.512 37.541,41.056 37.466,40.982 37.466,40.373 37.583,40.256 37.744,40.256 C51.1@38,40 37.744,39.744 37.583,39.744 37.466,39.627 37.466,37.134 38.6,36 38.949,35.651 44.074,35.651 44.173,35.75 U3.3@44.775,35.75
X_N: C50.1 U3.6 Y2.1 | length 19.2
  TOP SIG w0.2: Y2.1@31.65,41.625 32.075,42.05 32.466,42.05 32.48,42.064 32.68,42.064 32.797,41.947 32.797,41.173 32.349,40.725 32.349,40.277 32.232,40.16 32.16,40.16 C50.1@32,40 32.16,39.84 32.232,39.84 32.349,39.723 32.349,39.124 32.526,38.948 36.398,35.075 37.124,34.349 44.074,34.349 44.173,34.25 U3.6@44.775,34.25
X_P: C49.1 U3.5 Y2.3 | length 19.2
  TOP SIG w0.2: Y2.3@33.95,43.375 33.825,43.375 33.033,42.583 33.033,42.137 33.098,42.072 33.098,41.048 32.651,40.6 32.651,40.277 32.768,40.16 32.84,40.16 C49.1@33,40 32.84,39.84 32.768,39.84 32.651,39.723 32.651,39.249 36.7,35.2 37.249,34.651 44.074,34.651 44.173,34.75 U3.5@44.775,34.75
pads on no net: D1.2 D1.4 D1.5 D1.6 D1.7 D1.9 J3.7 J3.8 J3.9 U3.2 U3.8 U3.16 U3.17 U3.18 U3.22 U3.25 U3.26 U3.29 U3.32 U3.33 U3.34 U3.41 U3.42 U3.43 U3.46

## Polygon pours and split planes (outlines as drawn)
GND on PWR "GND_L02_P000" (solid, pour order 0): 0,4 0,51 cw(c4,51) 4,55 61,55 cw(c61,51) 65,51 65,4 cw(c61,4) 61,0 4,0 cw(c4,4)
GND on GND "GND_L03_P001" (solid, pour order 1): 0,4 0,51 cw(c4,51) 4,55 61,55 cw(c61,51) 65,51 65,4 cw(c61,4) 61,0 4,0 cw(c4,4)
GND on BOT SIG "GND_L04_P002" (solid, pour order 2): 0,4 0,51 cw(c4,51) 4,55 61,55 cw(c61,51) 65,51 65,4 cw(c61,4) 61,0 4,0 cw(c4,4)
GND on TOP SIG "GND_L01_P003" (solid, pour order 3): 0,4 0,51 cw(c4,51) 4,55 61,55 cw(c61,51) 65,51 65,4 cw(c61,4) 61,0 4,0 cw(c4,4)

## Silkscreen, mask and mechanical layers (free items; w line width, h text height)
Top Overlay:
  drawing of 29 lines, arcs and shapes, not listed
  text "CSI-2 (RPI/JETSON PINOUT)" at 8.2,52.2 h1
  text "DBG" at 45.735,52.2 h1
  text "RST" at 40.675,51.595 h1
  text "BOOT" at 34.167,51.57 h1
  text "PWR" at 59.7,38.7 h1
  text "IO 0" at 23.963,34.652 h1
  text "MCU" at 59.7,33.7 h1
  text "IO 1" at 23.963,33.202 h1
  text "SDA" at 29.248,32.912 h1
  text "MFP7" at 2.2,32.5 h1
  text "SCL" at 29.248,31.462 h1
  text "MFP8" at 2.2,30.5 h1
  text "MFP0" at 2.2,28.5 h1
  text "D3N" at 29.2,27.95 h1
  text "SDA" at 2.2,26.5 h1
  text "D3P" at 29.2,26.5 h1
  text "MFP6" at 34.2,26.5 h1
  text "SCL" at 2.2,24.5 h1
  text "MFP5" at 34.2,24.5 h1
  text "D2N" at 29.2,23.95 h1
  text "VREF" at 2.2,22.5 h1
  text "D2P" at 29.2,22.5 h1
  text "MFP4" at 34.2,22.5 h1
  text "3V3" at 2.2,20.5 h1
  text "MFP3" at 34.2,20.5 h1
  text "1V2" at 34.2,17.5 h1
  text "1V8" at 34.2,15.5 h1
  text "GMSL2 OUT" at 25.2,10.8 h1 r270
  text "MAX96717 EVAL" at 42.85,8.85 h1.5
  text "Project:" at 42.7,6.75 h0.75
  text "BRZ" at 49.65,6.65 h0.75
  text "Revision:" at 42.7,5.2 h0.75
  text "V1" at 49.65,5.15 h0.75
  text "PoC / TAP" at 37.5,4.5 h1
  text "Date:" at 42.7,3.7 h0.75
  text "07/09/2024" at 49.65,3.65 h0.75
Mechanical 1:
  the board outline again, w0.254